# Altium PCB Mode_V1.PcbDoc
Units mm, origin at the board's own origin, x right, y up, seen from the top; angles counter-clockwise.
Board outline 152.4 x 101.6 mm, 2 copper layers (Top Layer, Bottom Layer); 12 components, 12 nets, 42 pads, 0 vias.
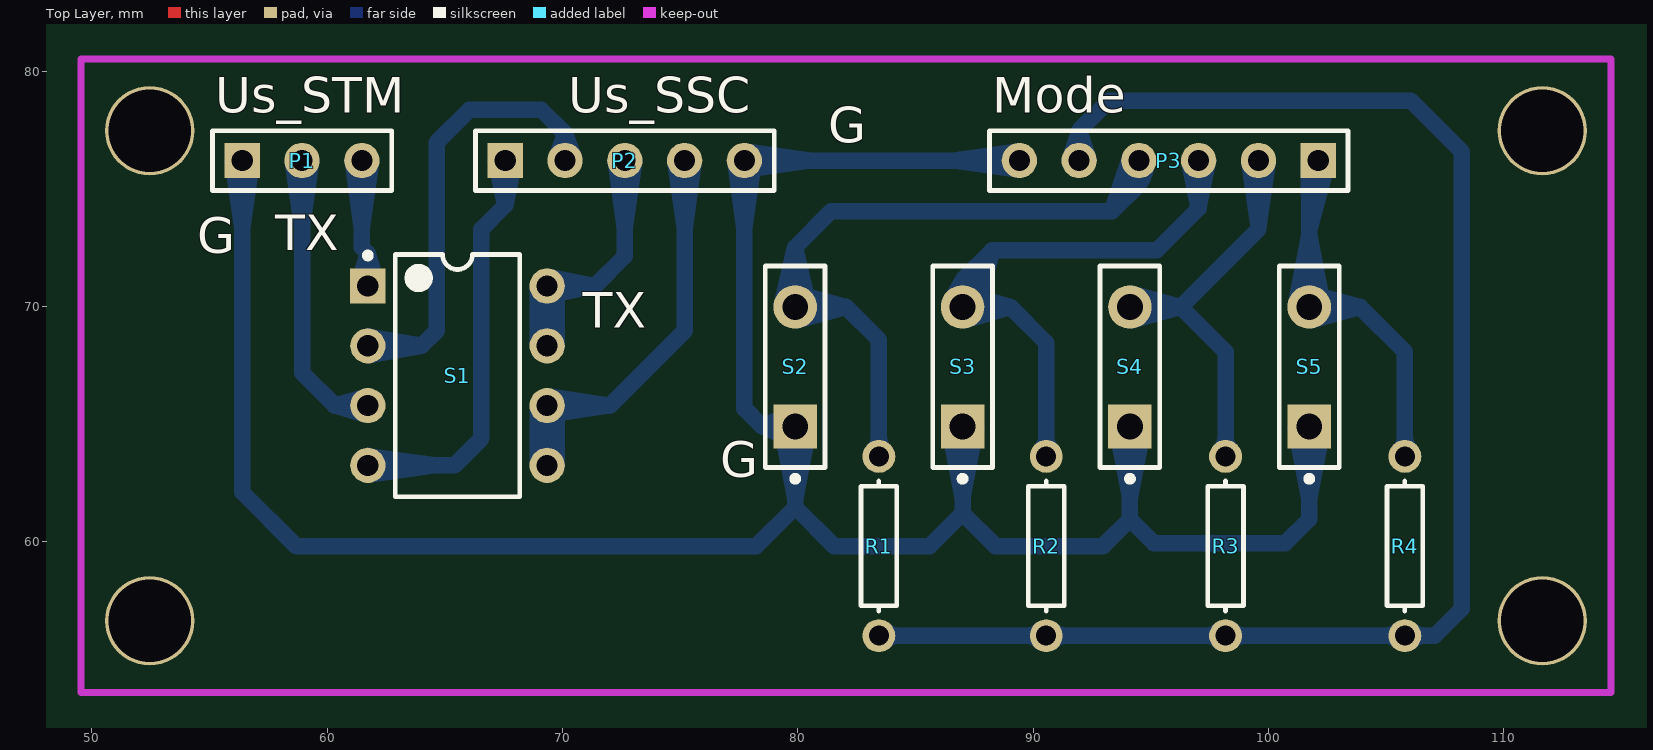
[diagram p0: Top Layer view]
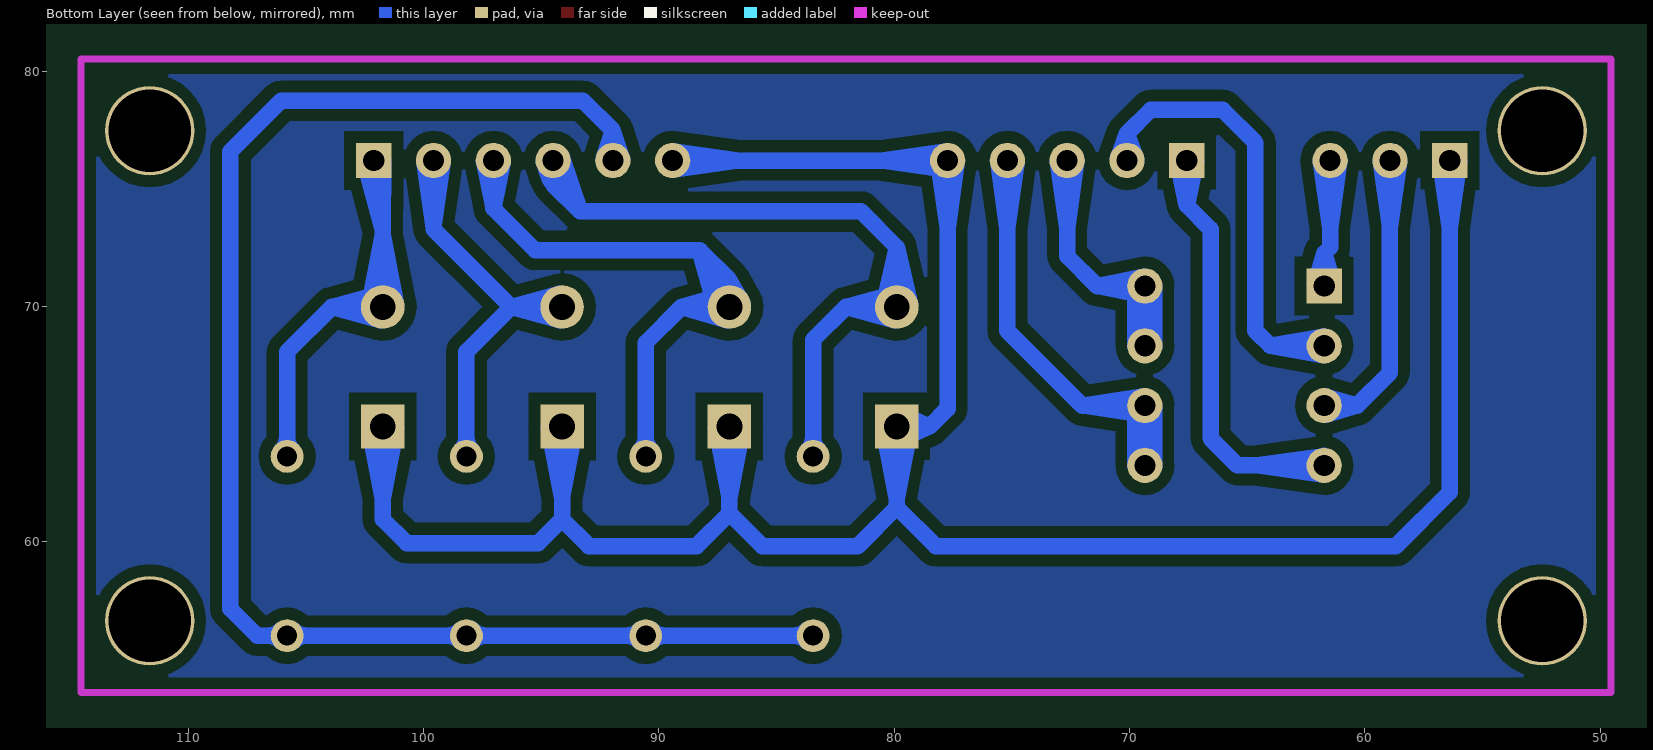
[diagram p1: Bottom Layer view, seen from below]

## Layer stack, top to bottom
Top Solder: solder mask 0.0102, Solder Resist, Dk 3.5
Top Layer: signal copper 0.0356
Dielectric1: dielectric 0.32, FR-4, Dk 4.8
Bottom Layer: signal copper 0.0356
Bottom Solder: solder mask 0.0102, Solder Resist, Dk 3.5

## Board outline
25.4,25.4 177.8,25.4 177.8,127 25.4,127

## Design rules (kind name [scope] priority, off if disabled: settings)
Clearance [All] p1: gap=0.5
PolygonConnect [All] p1: connectstyle=Relief reliefconductorwidth=0.254 reliefentries=4 polygonreliefangle="90 Angle" airgapwidth=0.254
RoutingVias [All] p1: holewidth=0.711 width=1.27 viastyle="Through Hole" minholewidth=0.711 minwidth=1.27 maxholewidth=0.711 maxwidth=1.27
SilkToSolderMaskClearance SilkscreenOverComponentPads [IsPad] p1: minsilkscreentomaskgap=0.254 clearancetoexposedcopper=TRUE
SolderMaskExpansion [All] p1: expansion=0.102
Width [All] p1: maxlimit=0.7 minlimit=0.3 preferedwidth=0.7
28 further rules are at their usual default settings.

## Classes and differential pairs
component class Mode_V1: P2 P3 R1 R2 R3 R4 S1 S2 S3 S4 S5

## Components (designator, comment, footprint, x,y, rotation, side; value= is the part's Value field where it differs from the comment)
P1 "Us_STM" HDR1X3 56.388,76.2 r0 top
P2 "Us_SSC" HDR1X5 67.564,76.2 r0 top
P3 "Mode" HDR1X6 102.108,76.2 r180 top
R1 "Res1" AXIAL-0.3 83.439,59.817 r270 top
R2 "Res1" AXIAL-0.3 90.551,59.817 r270 top
R3 "Res1" AXIAL-0.3 98.171,59.817 r270 top
R4 "Res1" AXIAL-0.3 105.791,59.817 r270 top
S1 "SW-DIP4" DIP-8 65.532,67.056 r0 top
S2 "SW-PB" SPST-2 79.883,67.437 r90 top
S3 "SW-PB" SPST-2 86.995,67.437 r90 top
S4 "SW-PB" SPST-2 94.107,67.437 r90 top
S5 "SW-PB" SPST-2 101.727,67.437 r90 top

## Footprints (in the part's own frame and the unit in brackets; to place one, negate y for a bottom-side part, rotate by r counter-clockwise, add the part's x,y. Pads: shape width x height; smd on the part's side, far side on the other; paste and mask are expansions set on the pad)
AXIAL-0.3 [mm] "Axial Device, Thru-Hole; 2 Leads; 0.3 in Pin Spacing"
  round 1.4 hole 0.85: 1(-3.81,0) 2(3.81,0)
  silkscreen extent -2.77,-0.76 2.77,0.76
DIP-8 [mm] "DIP; 8 Leads; Row Spacing 7.62 mm; Pitch 2.54 mm"
  rect 1.5x1.5 hole 0.9: 1(-3.81,3.81)
  round 1.5 hole 0.9: 2(-3.81,1.27) 3(-3.81,-1.27) 4(-3.81,-3.81) 5(3.81,-3.81) 6(3.81,-1.27) 7(3.81,1.27) 8(3.81,3.81)
  silkscreen extent -3.93,-5.15 2.65,5.23, body extent -3.6,-5.15 3.6,5.15, height 5.08
HDR1X3 [mm] "Connector; Header; 3 Position"
  rect 1.5x1.5 hole 0.9: 1(0,0)
  round 1.5 hole 0.9: 2(2.54,0) 3(5.08,0)
  silkscreen extent -1.27,-1.27 6.35,1.27
HDR1X5 [mm] "Connector; Header; 5 Position"
  rect 1.5x1.5 hole 0.9: 1(0,0)
  round 1.5 hole 0.9: 2(2.54,0) 3(5.08,0) 4(7.62,0) 5(10.16,0)
  silkscreen extent -1.27,-1.27 11.43,1.27
HDR1X6 [mm] "Connector; Header; 6 Position"
  rect 1.5x1.5 hole 0.9: 1(0,0)
  round 1.5 hole 0.9: 2(2.54,0) 3(5.08,0) 4(7.62,0) 5(10.16,0) 6(12.7,0)
  silkscreen extent -1.27,-1.27 13.97,1.27
SPST-2 [mm] "Circuit Breaker; 2 Leads"
  rect 1.85x1.85 hole 1.1: 1(-2.54,0)
  round 1.85 hole 1.1: 2(2.54,0)
  silkscreen extent -4.89,-1.27 4.28,1.27

## Part data
P1: library part "Header 3", "Header, 3-Pin"
P2: library part "Header 5", "Header, 5-Pin"
P3: library part "Header 6", "Header, 6-Pin"
R1 R2 R3 R4: "Resistor"
S1: "DIP Switch"
S2 S3 S4 S5: "Switch"

## Free pads (board coordinates)
  round 3.8 hole 3.5: 0(52.451,77.47) 0(111.633,56.642) 4(52.451,56.642) 5(111.633,77.47)

## Nets (pads, with @x,y where several pads share a name; then routed paths per layer and width w, separated by ;. In a path a pad name is that pad's centre, name@x,y a point inside that pad or via, vN(x,y) a via of type N, cw(c..) or ccw(c..) an arc to the next point about the centre after c; other vN are vias at no path point)
GND: P1.1 P2.5 P3.6 S2.1 S3.1 S4.1 S5.1 | length 202
  Bottom Layer w0.7: P1.1@55.989,76.172 56.388,73.35 P1.1@56.787,76.172 ; P1.1@56.105,75.917 cw(c55.422,75.234) 56.388,75.234 cw(c57.354,75.234) P1.1@56.671,75.917 ; P1.1 56.388,62.103 58.674,59.817 78.232,59.817 79.883,61.468 ; P2.5@77.325,76.172 77.724,73.35 P2.5@78.123,76.172 ; P2.5@77.441,75.917 cw(c76.758,75.234) 77.724,75.234 cw(c78.69,75.234) 78.007,75.917 cw(c78.69,75.234) 78.69,76.2 cw(c78.69,77.166) P2.5@78.007,76.483 ; 77.724,66.421 77.724,66.802 ; P2.5@77.752,75.801 80.574,76.2 P2.5@77.752,76.599 ; S2.1@79.311,64.842 79.883,61.872 S2.1@80.455,64.842 ; S2.1@79.324,64.762 79.836,63.868 ; S2.1@79.339,64.711 79.93,63.868 ; S2.1@79.476,65.304 cw(c78.495,66.285) 78.495,64.897 cw(c78.495,63.509) 79.476,64.49 cw(c78.495,63.509) 79.883,63.509 cw(c81.271,63.509) S2.1@80.29,64.49 ; S2.1@79.697,64.353 78.854,64.944 ; S2.1@79.697,65.441 78.854,64.85 ; S2.1@79.748,64.338 78.854,64.85 ; S2.1@79.748,65.456 78.854,64.944 ; S2.1@79.765,64.334 78.486,64.897 ; S2.1@79.765,65.46 78.486,64.897 ; S2.1@79.917,64.931 S2.1 ; S2.1@80.427,64.711 79.836,63.868 ; S2.1@80.442,64.762 79.93,63.868 ; S3.1@86.423,64.842 86.995,61.872 S3.1@87.567,64.842 ; S3.1@86.436,64.762 86.948,63.868 ; S3.1@86.451,64.711 87.042,63.868 ; S3.1@86.588,64.49 cw(c85.607,63.509) 86.995,63.509 cw(c88.383,63.509) S3.1@87.402,64.49 ; S3.1@87.539,64.711 86.948,63.868 ; S3.1@87.554,64.762 87.042,63.868 ; P3.6@89.125,75.917 ccw(c88.442,75.234) 88.442,76.2 ccw(c88.442,77.166) P3.6@89.125,76.483 ; P3.6@89.38,75.801 86.558,76.2 P3.6@89.38,76.599 ; P3.6 P2.5 77.724,66.802 ; S4.1@93.535,64.842 94.107,61.872 S4.1@94.679,64.842 ; S4.1@93.548,64.762 94.06,63.868 ; S4.1@93.563,64.711 94.154,63.868 ; S4.1@93.7,64.49 cw(c92.719,63.509) 94.107,63.509 cw(c95.495,63.509) S4.1@94.514,64.49 ; S4.1@94.651,64.711 94.06,63.868 ; S4.1@94.666,64.762 94.154,63.868 ; S5.1@101.155,64.842 101.727,61.872 S5.1@102.299,64.842 ; S5.1@101.168,64.762 101.68,63.868 ; S5.1@101.183,64.711 101.774,63.868 ; S5.1@101.32,64.49 cw(c100.339,63.509) 101.727,63.509 cw(c103.115,63.509) S5.1@102.134,64.49 ; S5.1@102.271,64.711 101.68,63.868 ; S5.1@102.286,64.762 101.774,63.868 ; 77.724,66.802 77.724,65.659 78.486,64.897 ; 78.486,64.897 S2.1 ; 78.854,64.85 S2.1 ; 78.854,64.944 S2.1 ; 79.836,63.868 S2.1 ; 79.883,61.468 81.534,59.817 85.598,59.817 86.995,61.214 ; 79.883,61.468 S2.1 ; S2.1 79.93,63.868 ; 86.948,63.868 S3.1 ; 86.995,61.214 88.392,59.817 92.964,59.817 94.107,60.96 ; 86.995,61.214 S3.1 ; S3.1 87.042,63.868 ; 94.06,63.868 S4.1 ; 94.107,60.96 95.123,59.944 100.711,59.944 101.727,60.96 S5.1 ; 94.107,60.96 S4.1 ; S4.1 94.154,63.868 ; 101.68,63.868 S5.1 ; S5.1 101.774,63.868
NetP1_2: P1.2 S1.3 | length 23.9
  Bottom Layer w0.7: P1.2@58.529,76.172 58.928,73.35 P1.2@59.327,76.172 ; P1.2@58.645,75.917 cw(c57.962,75.234) 58.928,75.234 cw(c59.894,75.234) P1.2@59.211,75.917 ; P1.2 58.928,67.183 60.325,65.786 ; S1.3@61.439,65.503 ccw(c60.756,64.82) 60.756,65.786 ccw(c60.756,66.752) S1.3@61.439,66.069 ; S1.3@61.665,65.39 60.325,65.786 ; S1.3@61.665,66.182 60.325,65.786 ; S1.3 60.325,65.786
NetP1_3: P1.3 S1.1 | length 17
  Bottom Layer w0.7: P1.3@61.069,76.172 61.468,73.35 P1.3@61.867,76.172 ; P1.3@61.185,75.917 cw(c60.502,75.234) 61.468,75.234 cw(c62.434,75.234) P1.3@61.751,75.917 ; S1.1@61.326,70.923 61.722,72.263 ; S1.1@61.439,71.149 ccw(c60.756,71.832) 61.722,71.832 ccw(c62.688,71.832) S1.1@62.005,71.149 ; P1.3 61.468,72.517 61.722,72.263 ; S1.1 61.722,72.263 ; S1.1@62.118,70.923 61.722,72.263
NetP2_1: P2.1 S1.4 | length 30.1
  Bottom Layer w0.7: S1.4 65.405,63.246 66.548,64.389 66.548,73.279 67.564,74.295 ; S1.4@61.75,62.847 64.572,63.246 S1.4@61.75,63.645 ; S1.4@62.005,62.963 cw(c62.688,62.28) 62.688,63.246 cw(c62.688,64.212) S1.4@62.005,63.529 ; P2.1@67.166,76.158 67.564,74.295 ; P2.1@67.281,75.917 cw(c66.598,75.234) 67.564,75.234 cw(c68.53,75.234) P2.1@67.847,75.917 ; P2.1 67.564,74.295 ; P2.1@67.962,76.158 67.564,74.295
NetP2_2: P2.2 S1.2 | length 28.7
  Bottom Layer w0.7: S1.2 64.008,68.326 ; S1.2@61.757,67.928 64.008,68.326 ; S1.2@61.757,68.724 64.008,68.326 ; S1.2@62.005,68.043 cw(c62.688,67.36) 62.688,68.326 cw(c62.688,69.292) S1.2@62.005,68.609 ; P2.2@69.71,76.27 70.104,77.343 ; P2.2@69.821,76.483 ccw(c69.138,77.166) 70.104,77.166 ccw(c71.07,77.166) P2.2@70.387,76.483 ; P2.2 70.104,77.343 ; P2.2@70.498,76.27 70.104,77.343 ; 64.008,68.326 64.643,68.961 64.643,76.962 66.04,78.359 69.088,78.359 70.104,77.343
NetP2_3: P2.3 S1.7 S1.8 | length 46.6
  Bottom Layer w0.7: S1.7@68.943,68.295 S1.8@68.943,70.835 ; S1.7@68.943,68.357 S1.8 ; S1.7@68.953,68.42 S1.8@69.741,70.835 ; S1.7@69.059,68.609 ccw(c68.376,69.292) 69.342,69.292 ccw(c70.308,69.292) S1.7@69.625,68.609 ; S1.8@69.059,70.583 cw(c68.376,69.9) 69.342,69.9 cw(c70.308,69.9) 69.625,70.583 cw(c70.308,69.9) 70.308,70.866 cw(c70.308,71.832) S1.8@69.625,71.149 ; S1.8@69.381,70.468 71.374,70.866 ; S1.8@69.381,71.264 71.374,70.866 ; S1.7@69.731,68.42 S1.8@68.943,70.835 ; S1.7@69.741,68.295 S1.8@69.741,70.835 ; S1.7@69.741,68.357 S1.8 ; P2.3@72.245,76.172 72.644,73.35 P2.3@73.043,76.172 ; P2.3@72.361,75.917 cw(c71.678,75.234) 72.644,75.234 cw(c73.61,75.234) P2.3@72.927,75.917 ; P2.3 72.644,72.136 71.374,70.866 ; S1.8@68.943,70.835 S1.7 ; S1.7 S1.8@69.741,70.835 ; S1.7 S1.8 ; S1.8 71.374,70.866
NetP2_4: P2.4 S1.5 S1.6 | length 54.4
  Bottom Layer w0.7: S1.5@68.943,63.215 S1.6@68.943,65.755 ; S1.5@68.943,63.277 S1.6 ; S1.5@68.953,63.34 S1.6@69.741,65.755 ; S1.5@69.059,63.529 ccw(c68.376,64.212) 69.342,64.212 ccw(c70.308,64.212) S1.5@69.625,63.529 ; S1.6@69.059,65.503 cw(c68.376,64.82) 69.342,64.82 cw(c70.308,64.82) 69.625,65.503 cw(c70.308,64.82) 70.308,65.786 cw(c70.308,66.752) S1.6@69.625,66.069 ; S1.6@69.372,65.387 72.009,65.786 ; S1.6@69.372,66.185 72.009,65.786 ; S1.5@69.731,63.34 S1.6@68.943,65.755 ; S1.5@69.741,63.215 S1.6@69.741,65.755 ; S1.5@69.741,63.277 S1.6 ; P2.4@74.785,76.172 75.184,73.35 P2.4@75.583,76.172 ; P2.4@74.901,75.917 cw(c74.218,75.234) 75.184,75.234 cw(c76.15,75.234) P2.4@75.467,75.917 ; P2.4 75.184,68.961 72.009,65.786 ; S1.6@68.943,65.755 S1.5 ; S1.5 S1.6@69.741,65.755 ; S1.5 S1.6 ; S1.6 72.009,65.786
NetP3_1: P3.1 R4.1 S5.2 | length 58.9
  Bottom Layer w0.7: S5.2@101.155,70.032 101.727,73.002 S5.2@102.299,70.032 ; S5.2@101.168,70.112 101.68,71.006 ; S5.2@101.183,70.163 101.774,71.006 ; S5.2@101.32,70.384 ccw(c100.339,71.365) 101.727,71.365 ccw(c103.115,71.365) 102.134,70.384 ccw(c103.115,71.365) 103.115,69.977 ccw(c103.115,68.589) S5.2@102.134,69.57 ; P3.1@101.709,76.224 101.727,73.221 ; P3.1@101.709,76.232 101.804,74.901 ; 101.727,74.315 cw(c103.993,74.315) P3.1@102.391,75.917 ; S5.2@101.804,69.407 103.886,69.977 ; S5.2@101.804,70.547 103.886,69.977 ; S5.2@101.862,69.418 102.756,69.93 ; S5.2@101.862,70.536 102.756,70.024 ; S5.2@101.913,69.433 102.756,70.024 ; S5.2@101.913,70.521 102.756,69.93 ; S5.2@102.271,70.163 101.68,71.006 ; S5.2@102.286,70.112 101.774,71.006 ; P3.1@102.479,76.052 101.804,74.901 ; P3.1@102.501,76.123 101.727,73.221 ; R4.1@105.544,63.874 ccw(c104.946,64.472) 105.791,64.472 ccw(c106.636,64.472) R4.1@106.038,63.874 ; R4.1 105.791,68.072 103.886,69.977 ; 101.68,71.006 S5.2 ; S5.2 101.774,71.006 ; S5.2 102.756,69.93 ; S5.2 102.756,70.024 ; S5.2 103.886,69.977 ; S5.2 101.727,75.819 P3.1 ; 101.727,73.221 P3.1 ; 101.804,74.901 P3.1
NetP3_2: P3.2 R3.1 S4.2 | length 38.1
  Bottom Layer w0.7: S4.2@94.184,69.407 96.266,69.977 ; S4.2@94.184,70.547 96.266,69.977 ; S4.2@94.242,69.418 95.136,69.93 ; S4.2@94.242,70.536 95.136,70.024 ; S4.2@94.293,69.433 95.136,70.024 ; S4.2@94.293,70.521 95.136,69.93 ; S4.2@94.514,69.57 cw(c95.495,68.589) 95.495,69.977 cw(c95.495,71.365) S4.2@94.514,70.384 ; R3.1@97.924,63.874 ccw(c97.326,64.472) 98.171,64.472 ccw(c99.016,64.472) R3.1@98.418,63.874 ; R3.1 98.171,68.072 96.266,69.977 ; P3.2@99.169,76.172 99.568,73.35 P3.2@99.967,76.172 ; P3.2@99.285,75.917 cw(c98.602,75.234) 99.568,75.234 cw(c100.534,75.234) P3.2@99.851,75.917 ; P3.2 99.568,73.279 96.266,69.977 ; S4.2 95.136,69.93 ; S4.2 95.136,70.024 ; S4.2 96.266,69.977
NetP3_3: P3.3 R2.1 S3.2 | length 69.2
  Bottom Layer w0.7: S3.2@86.517,70.297 88.265,72.39 ; S3.2@86.525,70.308 87.653,71.412 ; S3.2@86.652,70.439 ccw(c86.147,71.12) 86.995,71.12 ; S3.2@86.872,69.953 cw(c88.519,70.272) 87.333,71.458 ; S3.2@87.076,69.408 89.027,69.977 ; S3.2@87.076,70.546 89.027,69.977 ; S3.2@87.13,69.418 88.024,69.93 ; S3.2@87.13,70.536 88.024,70.024 ; S3.2@87.181,69.433 88.024,70.024 ; S3.2@87.181,70.521 88.024,69.93 ; S3.2@87.338,70.439 cw(c87.843,71.12) 86.995,71.12 ; S3.2@87.402,69.57 cw(c88.383,68.589) 88.383,69.977 cw(c88.383,71.365) S3.2@87.402,70.384 ; S3.2@87.529,69.764 88.265,72.39 ; S3.2@87.553,69.836 87.653,71.412 ; S3.2@87.56,70.086 cw(c90.081,70.574) 88.265,72.39 ; R2.1@90.304,63.874 ccw(c89.706,64.472) 90.551,64.472 ccw(c91.396,64.472) R2.1@90.798,63.874 ; R2.1 90.551,68.453 89.027,69.977 ; P3.3@96.63,76.161 97.028,74.168 ; P3.3@96.745,75.917 cw(c96.062,75.234) 97.028,75.234 cw(c97.994,75.234) P3.3@97.311,75.917 ; P3.3@97.426,76.161 97.028,74.168 ; S3.2 86.995,71.12 ; S3.2 88.265,72.39 ; S3.2 87.653,71.412 ; S3.2 88.024,69.93 ; S3.2 88.024,70.024 ; S3.2 89.027,69.977 ; S3.2 86.995,71.12 ; 86.995,71.12 87.552,70.122 86.995,71.12 ; 86.995,71.12 86.438,70.122 86.995,71.12 ; 86.995,71.12 88.265,72.39 ; 88.265,72.39 95.25,72.39 97.028,74.168 ; 97.028,74.168 P3.3 97.028,74.168
NetP3_4: P3.4 R1.1 S2.2 | length 78.8
  Bottom Layer w0.7: S2.2@79.312,70.042 79.883,72.517 ; S2.2@79.324,70.112 79.836,71.006 ; S2.2@79.339,70.163 79.93,71.006 ; S2.2@79.476,70.384 ccw(c78.495,71.365) 79.883,71.365 ccw(c81.271,71.365) 80.29,70.384 ccw(c81.271,71.365) 81.271,69.977 ccw(c81.271,68.589) S2.2@80.29,69.57 ; S2.2@79.96,69.407 82.042,69.977 ; S2.2@79.96,70.547 82.042,69.977 ; S2.2@80.018,69.418 80.912,69.93 ; S2.2@80.018,70.536 80.912,70.024 ; S2.2@80.069,69.433 80.912,70.024 ; S2.2@80.069,70.521 80.912,69.93 ; S2.2@80.427,70.163 79.836,71.006 ; S2.2@80.442,70.112 79.93,71.006 ; S2.2@80.454,70.042 79.883,72.517 ; R1.1@83.192,63.874 ccw(c82.594,64.472) 83.439,64.472 ccw(c84.284,64.472) R1.1@83.686,63.874 ; R1.1 83.439,68.58 82.042,69.977 ; P3.4@94.09,76.157 cw(c91.509,75.877) 93.345,74.041 ; P3.4@94.104,76.311 93.885,74.829 ; P3.4@94.12,76.358 93.345,74.041 ; P3.4@94.205,75.917 cw(c93.522,75.234) 94.488,75.234 cw(c95.454,75.234) P3.4@94.771,75.917 ; 94.378,75.074 ccw(c93.374,76.079) P3.4@94.786,76.232 ; P3.4@94.825,75.985 93.345,74.041 ; P3.4@94.829,75.991 93.885,74.829 ; 79.836,71.006 S2.2 ; S2.2 80.912,69.93 ; S2.2 80.912,70.024 ; S2.2 79.93,71.006 ; S2.2 82.042,69.977 ; S2.2 79.883,72.517 ; 79.883,72.517 81.407,74.041 93.345,74.041 ; 93.345,74.041 P3.4 ; 93.345,74.041 94.488,75.184 ; 93.885,74.829 P3.4 ; 94.488,75.184 P3.4 ; 94.488,75.184 94.096,76.121 94.488,75.184 ; 94.488,75.184 94.88,76.121 94.488,75.184 ; 94.488,75.184 P3.4 ; 94.488,75.184 P3.4
VCC: P3.5 R1.2 R2.2 R3.2 R4.2 | length 77
  Bottom Layer w0.7: R1.2 R2.2 R3.2 R4.2 107.061,56.007 108.204,57.15 108.204,76.581 106.045,78.74 93.218,78.74 91.948,77.47 ; R1.2@83.686,55.76 cw(c84.284,55.162) 84.284,56.007 cw(c84.284,56.852) R1.2@83.686,56.254 ; R2.2@90.304,55.76 ccw(c89.706,55.162) 89.706,56.007 ccw(c89.706,56.852) R2.2@90.304,56.254 ; R2.2@90.798,55.76 cw(c91.396,55.162) 91.396,56.007 cw(c91.396,56.852) R2.2@90.798,56.254 ; P3.5@91.553,76.263 91.948,77.47 ; P3.5@91.665,76.483 ccw(c90.982,77.166) 91.948,77.166 ccw(c92.914,77.166) P3.5@92.231,76.483 ; P3.5 91.948,77.47 ; P3.5@92.343,76.263 91.948,77.47 ; R3.2@97.924,55.76 ccw(c97.326,55.162) 97.326,56.007 ccw(c97.326,56.852) R3.2@97.924,56.254 ; R3.2@98.418,55.76 cw(c99.016,55.162) 99.016,56.007 cw(c99.016,56.852) R3.2@98.418,56.254 ; R4.2@105.544,55.76 ccw(c104.946,55.162) 104.946,56.007 ccw(c104.946,56.852) R4.2@105.544,56.254 ; R4.2@106.038,55.76 cw(c106.636,55.162) 106.636,56.007 cw(c106.636,56.852) R4.2@106.038,56.254

## Polygon pours and split planes (outlines as drawn)
no net on Bottom Layer "Bottom Layer-No Net" (solid, pour order 3): 49.53,80.518 114.554,80.518 114.554,53.594 49.53,53.594 49.53,80.518

## Keep-outs
Keep-Out Layer:
  lines w0.3: 49.53,53.594 49.53,80.518 114.554,80.518 114.554,53.594 49.53,53.594

## Silkscreen, mask and mechanical layers (free items; w line width, h text height)
Top Overlay:
  text "G" at 81.28,76.962 h1.52
  text "TX" at 57.785,72.39 h1.52
  text "G" at 54.483,72.263 h1.52
  text "TX" at 70.866,69.088 h1.52
  text "G" at 76.708,62.738 h1.52

## Dimensions
114.554,80.518 to 114.554,53.594 on Mechanical 1
114.554,80.518 to 49.53,80.518 on Mechanical 1
52.451,77.47 to 49.53,80.518 on Mechanical 1
52.451,77.47 to 49.53,80.518 on Mechanical 1
52.451,56.642 to 49.53,53.594 on Mechanical 1
52.451,56.642 to 49.53,53.594 on Mechanical 1
111.633,56.642 to 114.554,53.594 on Mechanical 1
111.633,56.642 to 114.554,53.594 on Mechanical 1
111.633,77.47 to 114.554,80.518 on Mechanical 1
111.633,77.47 to 114.554,80.518 on Mechanical 1